# Altium PCB PCB1.PcbDoc
Units mm, origin at the board's own origin, x right, y up, seen from the top; angles counter-clockwise.
Board outline 49.96 x 48.34 mm, 2 copper layers (Top Layer, Bottom Layer); 54 components, 44 nets, 208 pads, 42 vias.
Unrouted connection lines stored in the file: 54.
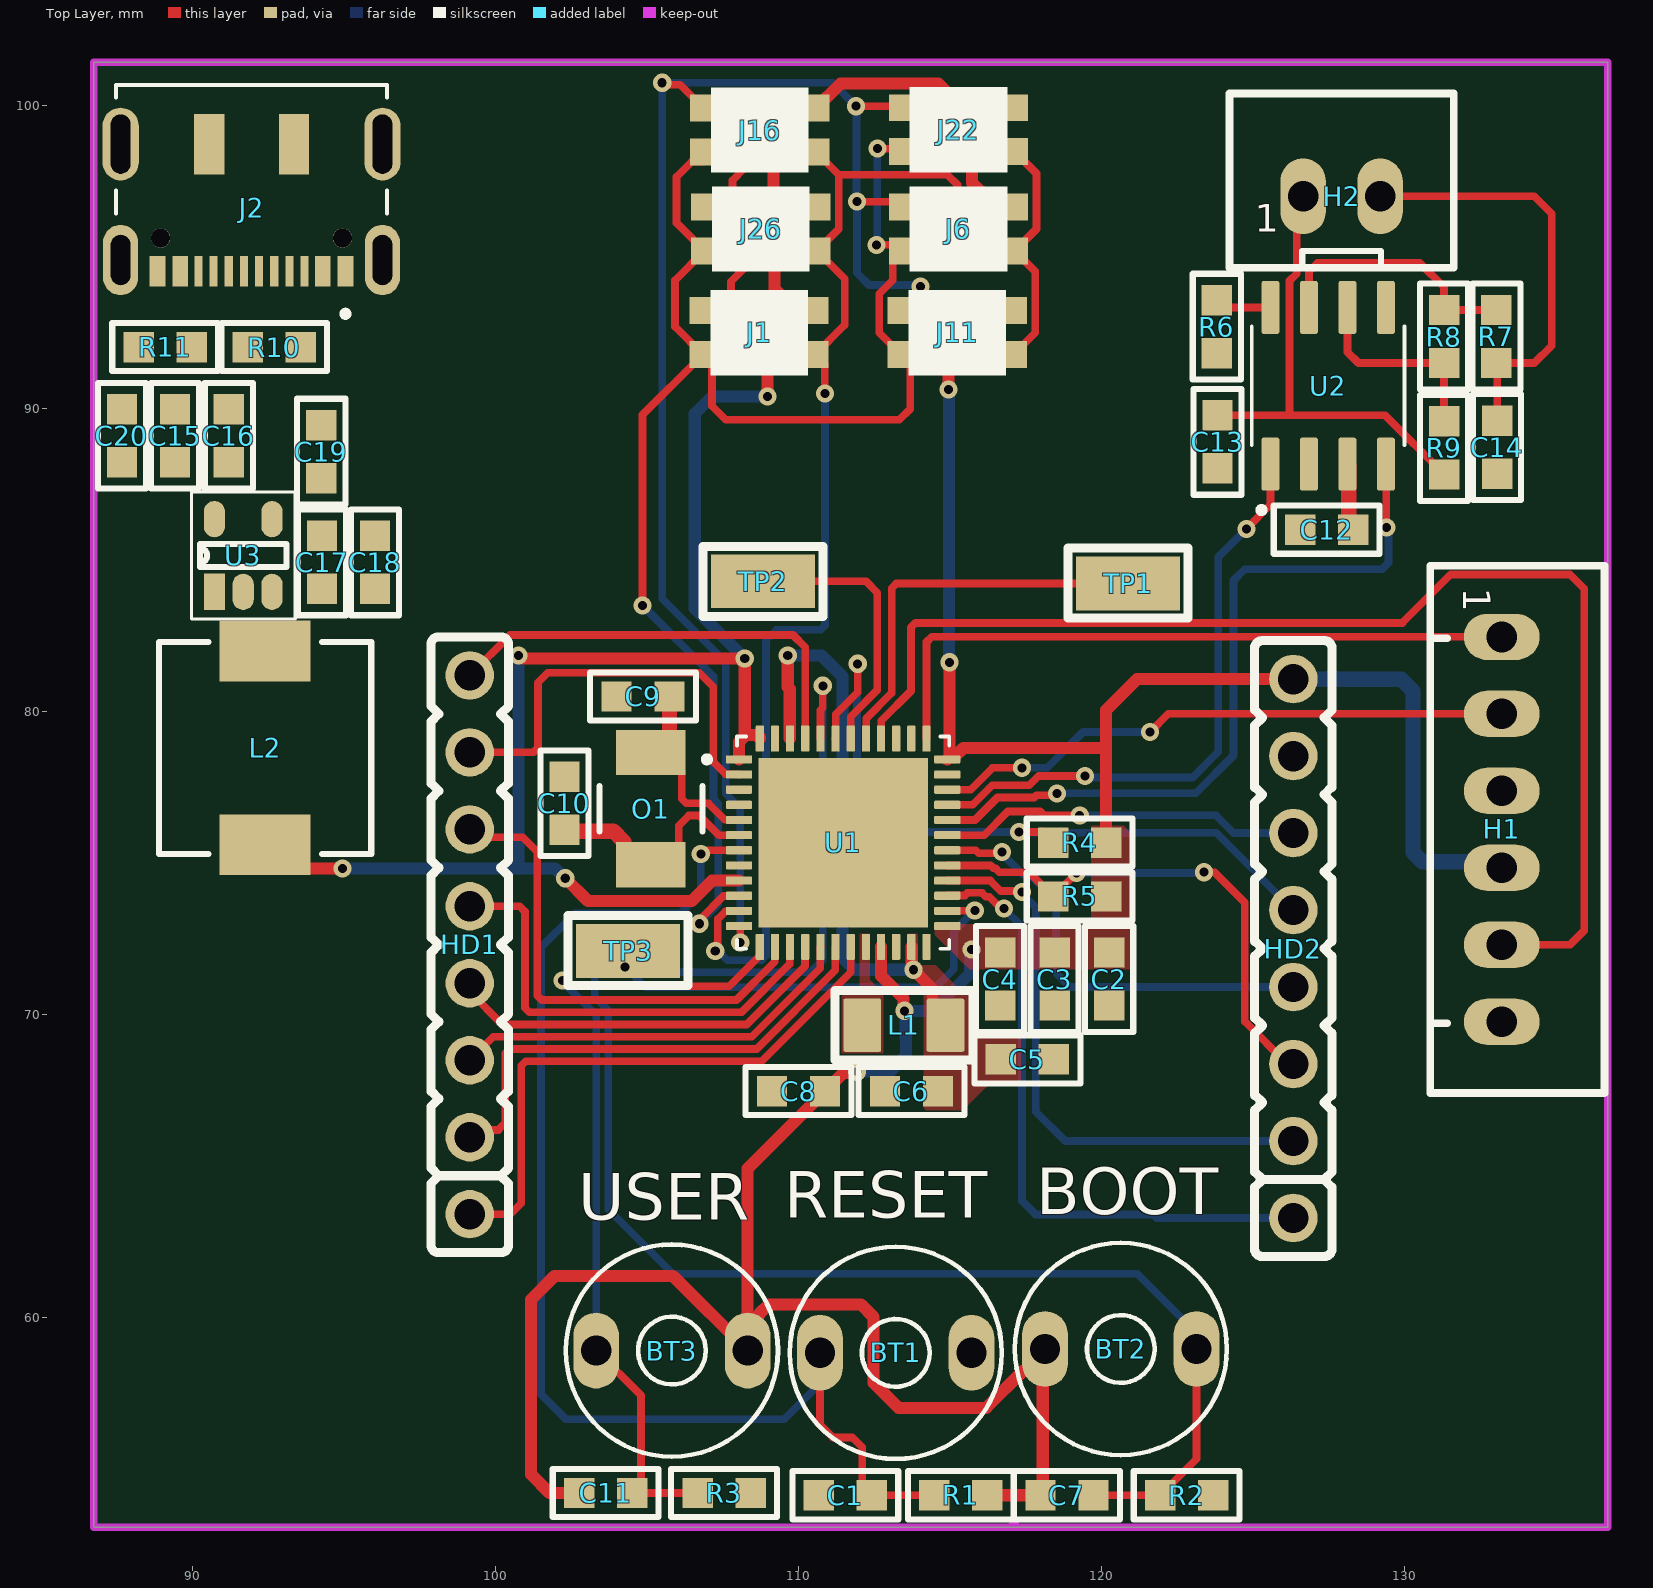
[diagram p0: Top Layer view]
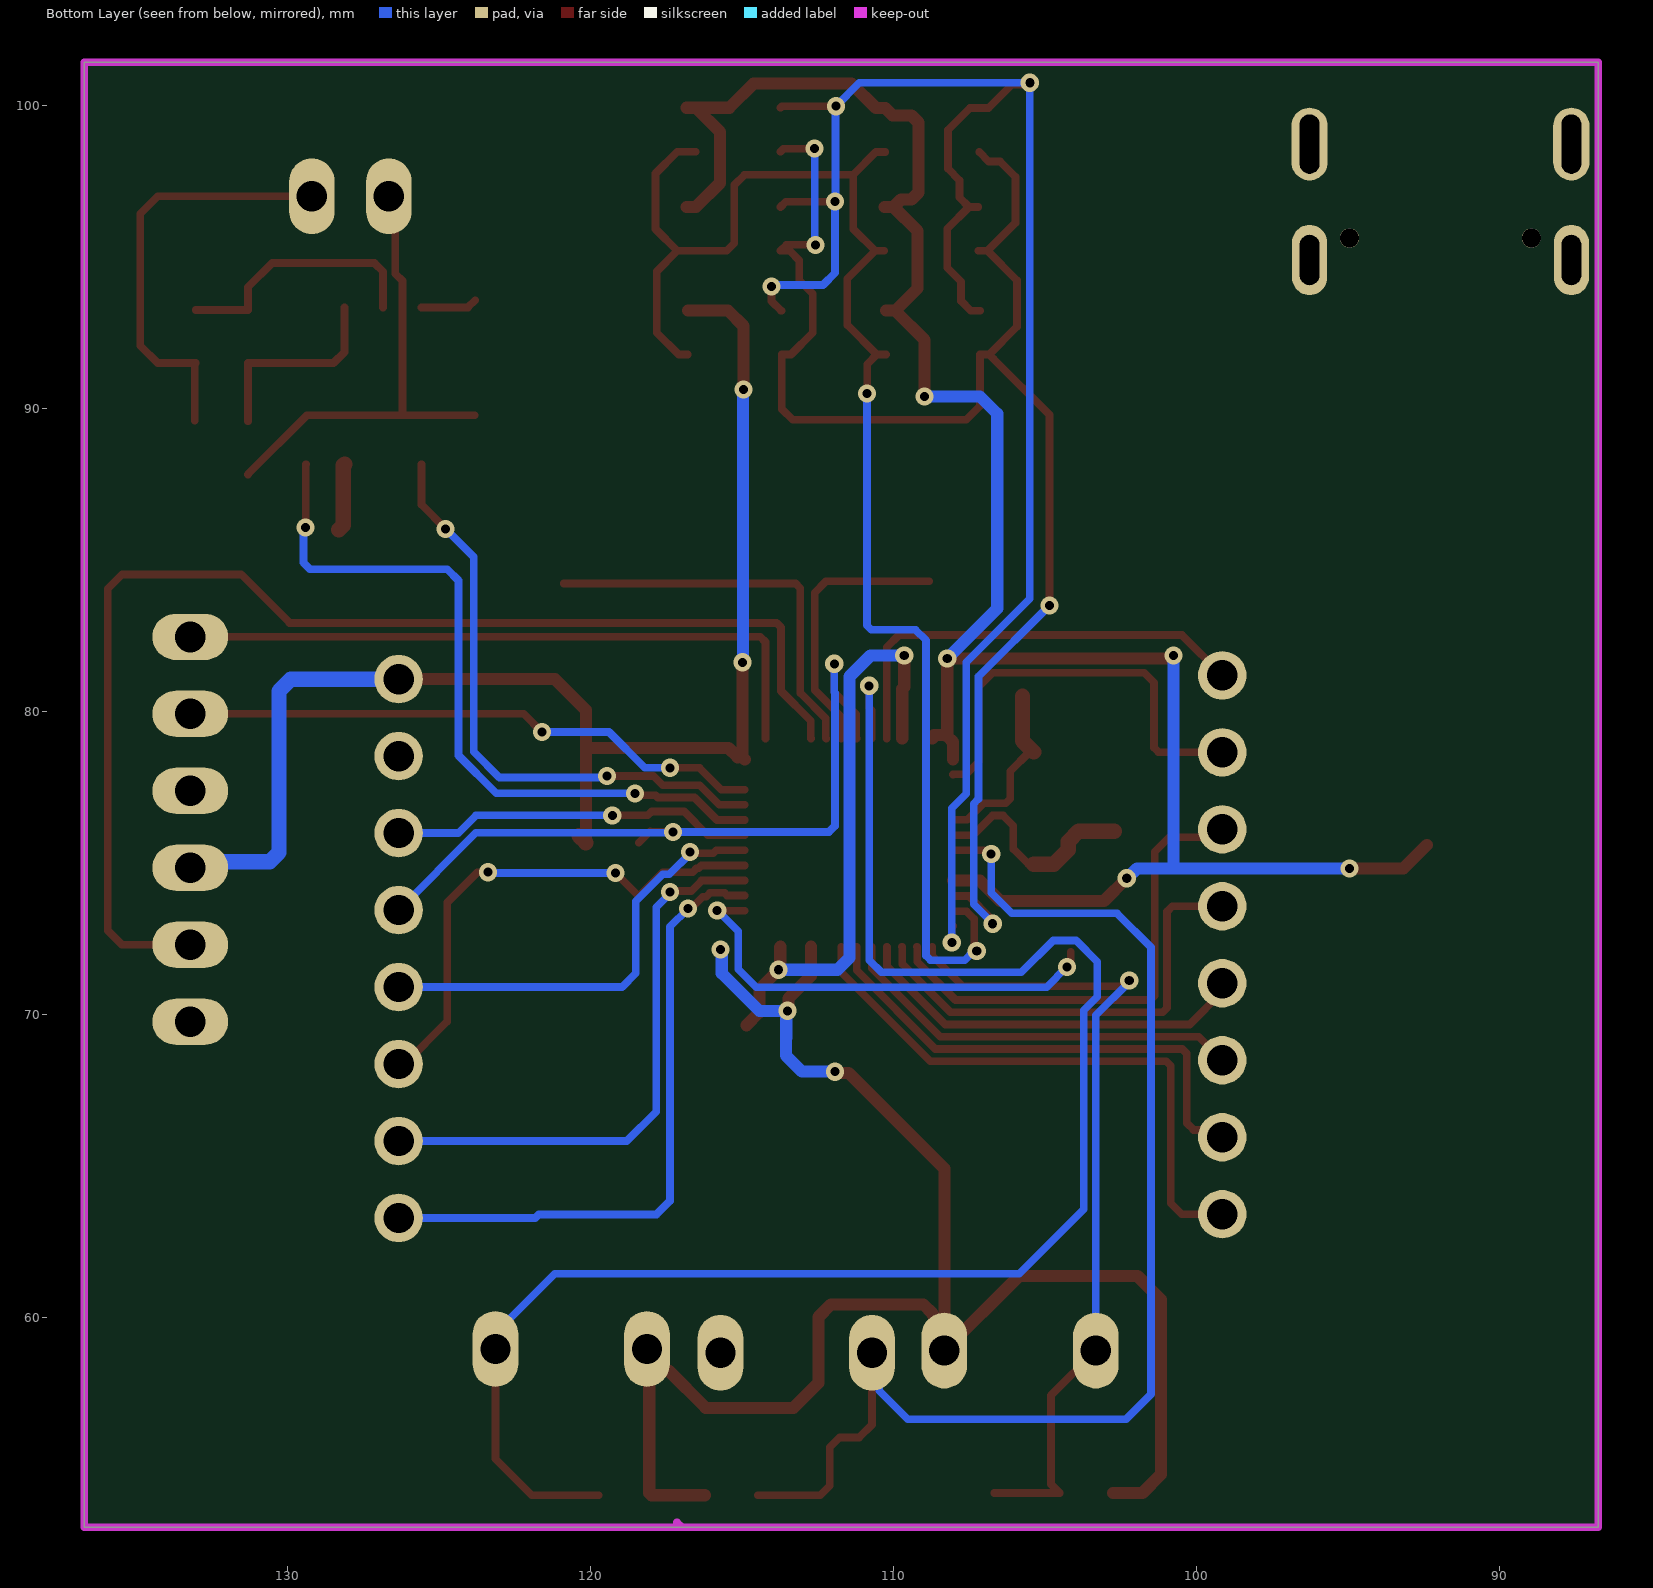
[diagram p1: Bottom Layer view, seen from below]
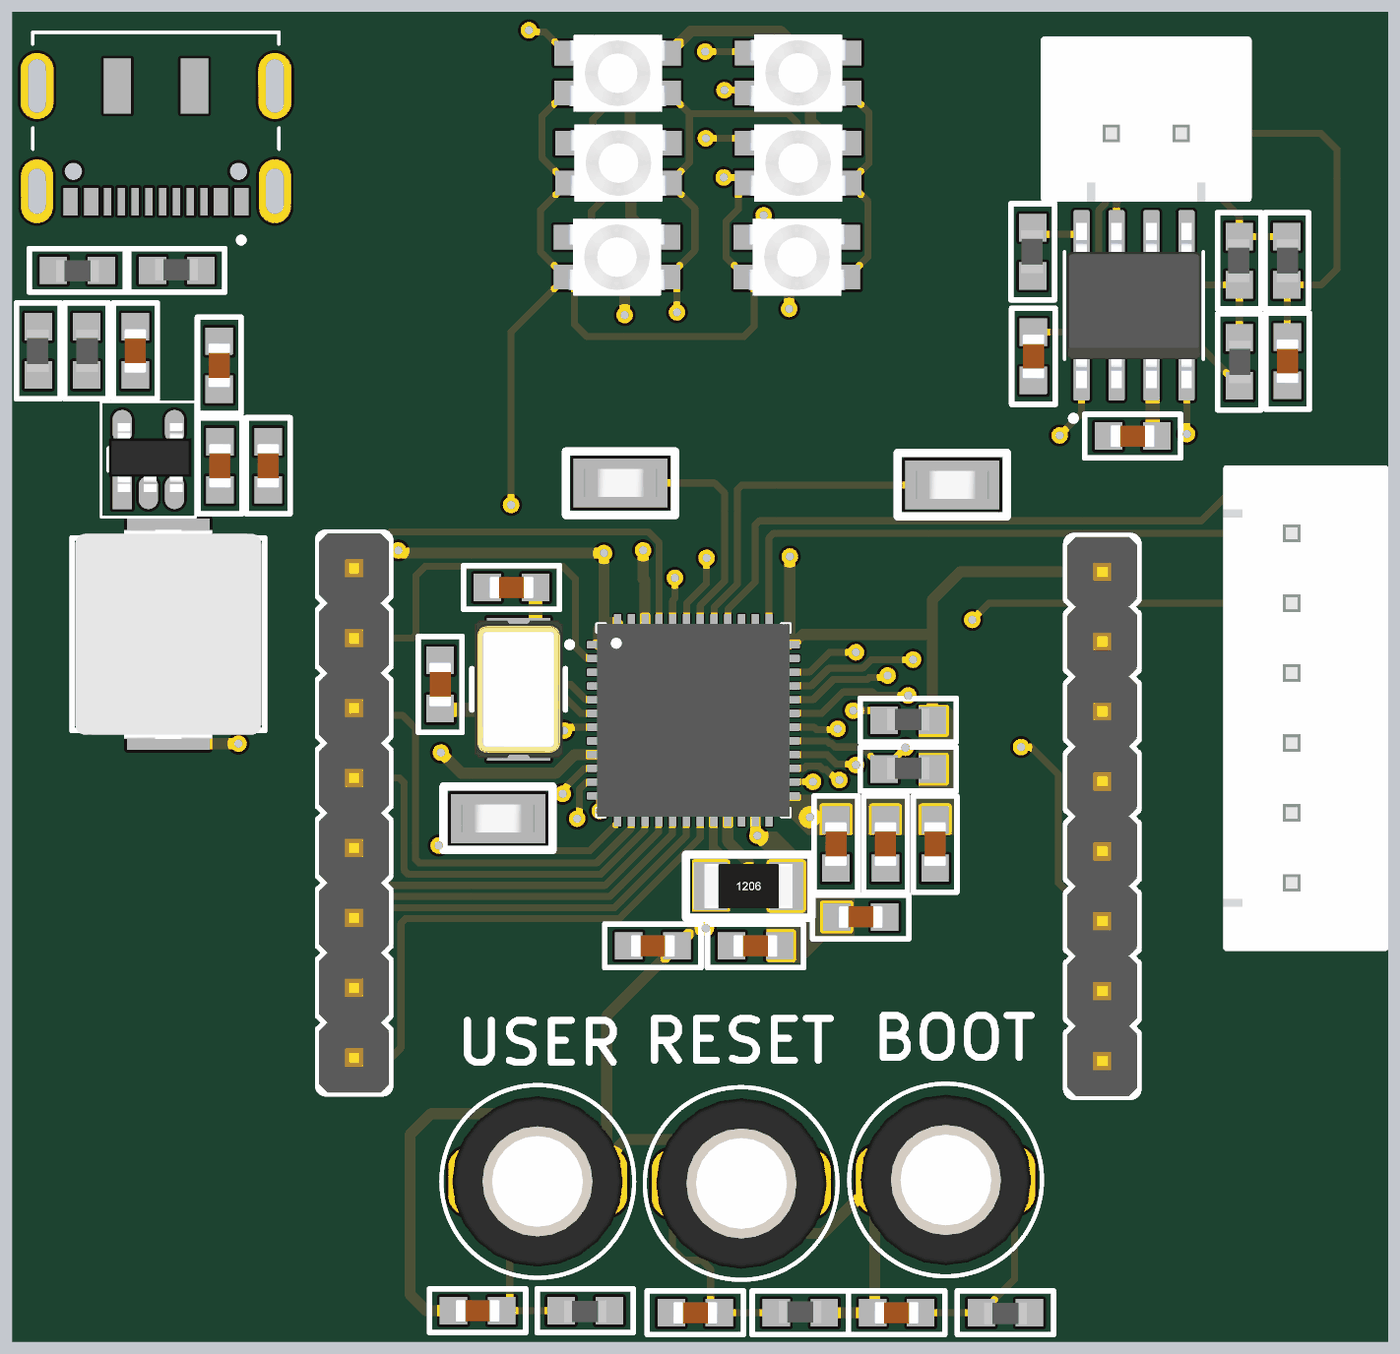
[diagram p2: 3D render of the assembled board from above, using the file's embedded part models]

## Layer stack, top to bottom
Top Solder: solder mask 0.0102, Solder Resist, Dk 3.5
Top Layer: signal copper 0.0356
Dielectric 1: dielectric 0.32, FR-4, Dk 4.8
Bottom Layer: signal copper 0.0356
Bottom Solder: solder mask 0.0102, Solder Resist, Dk 3.5

## Board outline
86.741,53.086 86.741,101.425 136.7,101.425 136.7,53.086

## Design rules (kind name [scope] priority, off if disabled: settings)
Clearance [All] p1: gap=0.15 ignorepadtopadclearanceinfootprint=FALSE
MinimumSolderMaskSliver [All] p1: minsoldermaskwidth=0.2
PlaneConnect [All] p1: planeconnectstyle=Direct reliefexpansion=0.508 reliefentries=4 reliefconductorwidth=0.254 reliefairgap=0.254
PolygonConnect [All] p1: connectstyle=Direct reliefconductorwidth=0.254 reliefentries=4 polygonreliefangle="90 Angle" airgapwidth=0.254
RoutingCorners [All] p1: cornerstyle=Round minsetback=2.54 maxsetback=2.54
RoutingVias [All] p1: holewidth=0.3 width=0.6 viastyle="Through Hole" minholewidth=0.3 minwidth=0.6 maxholewidth=0.3 maxwidth=0.6
SolderMaskExpansion [All] p1: expansion=0.102 istentingtop=FALSE
Width [All] p1: maxlimit=1 minlimit=0.254 preferedwidth=0.4 minimp=50.000000 maximp=50.000000 favimp=50.000000
27 further rules are at their usual default settings.

## Classes and differential pairs
component class POWER: C15 C16 C17 C18 C19 C20 HD1 HD2 J2 L2 R4 R5 R10 R11 U3
component class CAN: C12 C13 C14 H2 R6 R7 R8 R9 U2
component class "LED RGBSchDoc": J1 J6 J11 J16 J22 J26
component class Sheet1: BT1 BT2 BT3 C1 C2 C3 C4 C5 C6 C7 C8 C9 C10 C11 H1 L1 O1 R1 R2 R3 TP1 TP2 TP3 U1

## Components (designator, comment, footprint, x,y, rotation, side; value= is the part's Value field where it differs from the comment)
BT1 "SPST_DIP" SPST_BUTTON_2DIP 113.207,58.84 r0 top
BT2 "SPST_DIP" SPST_BUTTON_2DIP 120.633,58.967 r0 top
BT3 "SPST_DIP" SPST_BUTTON_2DIP 105.82,58.915 r180 top
C1 "100nF" C0603 111.542,54.141 r0 top
C2 "100nF" C0603 120.25,71.175 r90 top
C3 "1uF" C0603 118.45,71.175 r90 top
C4 "10uF" C0603 116.65,71.175 r90 top
C5 "2.2uF" C0603 117.55,68.525 r180 top
C6 "2.2uF" C0603 113.725,67.475 r0 top
C7 "100nF" C0603 118.855,54.141 r180 top
C8 "10uF" C0603 110,67.475 r180 top
C9 "10pF" C0603 104.867,80.499 r180 top
C10 "10pF" C0603 102.275,76.975 r90 top
C11 "100nF" C0603 103.635,54.216 r180 top
C12 "100nF" C0603 127.425,86 r180 top
C13 "30pF" C0603 123.825,88.9 r270 top
C14 "30pF" C0603 133.05,88.725 r270 top
C15 "100K" R0603 89.425,89.1 r270 top
C16 "22pF" C0603 91.2,89.1 r90 top
C17 "22uF" C0603 94.275,84.925 r270 top
C18 "22uF" C0603 96.025,84.925 r270 top
C19 "22uF" C0603 94.25,88.575 r90 top
C20 "22K" R0603 87.675,89.1 r90 top
H1 "XH2.54_6Y" JST-XH-06-PACKAGE-LONG-PAD 133.2,76.115 r270 top
H2 "XH2.54_2Y" JST-XH-02-PACKAGE-LONG-PAD 127.92,97 r0 top
HD1 "HD8" Header_8 99.15,72.305 r90 top
HD2 "HD8" Header_8 126.325,72.18 r90 top
J1 "SMP4-RGB" 4-PLCC 108.695,92.505 r90 top
J2 "DX07S016JA1R1500" JAE_DX07S016JA1R1500 91.95,95.625 r180 top
J6 "SMP4-RGB" 4-PLCC 115.275,95.925 r90 top
J11 "SMP4-RGB" 4-PLCC 115.233,92.505 r90 top
J16 "SMP4-RGB" 4-PLCC 108.72,99.189 r90 top
J22 "SMP4-RGB" 4-PLCC 115.275,99.2 r90 top
J26 "SMP4-RGB" 4-PLCC 108.75,95.925 r90 top
L1 "2.2uH" "Res 1206 SMD" 113.475,69.65 r0 top
L2 "2R2" L0630 92.4,78.8 r270 top
O1 "CRYSTAL_5032" CRYSTAL_5032 105.125,76.8 r90 top
R1 "10K" R0603 115.352,54.141 r0 top
R2 "10K" R0603 122.806,54.141 r180 top
R3 "10K" R0603 107.544,54.216 r180 top
R4 "4.7K" R0603 119.275,75.675 r0 top
R5 "4.7K" R0603 119.275,73.9 r0 top
R6 "10K" R0603 123.8,92.7 r90 top
R7 "0" R0603 133.025,92.375 r270 top
R8 "120" R0603 131.3,92.375 r90 top
R9 "0" R0603 131.3,88.7 r270 top
R10 "5.1K" R0603 92.7,92.025 r0 top
R11 "5.1K" R0603 89.1,92.025 r180 top
TP1 "TP" Test_point_SMD 120.875,84.225 r180 top value="Test Point"
TP2 "TP" Test_point_SMD 108.825,84.3 r0 top value="Test Point"
TP3 "TP" Test_point_SMD 104.375,72.1 r180 top value="Test Point"
U1 "STM32U585CIU6Q" QFN50P700X700X60-49N 111.471,75.673 r0 top
U2 "TJA1050T/CM,118" SOIC127P600X175-8N 127.475,90.75 r90 top
U3 "SY8089_1" SOT23-5 90.725,83.95 r90 top

## Footprints (in the part's own frame and the unit in brackets; to place one, negate y for a bottom-side part, rotate by r counter-clockwise, add the part's x,y. Pads: shape width x height; smd on the part's side, far side on the other; paste and mask are expansions set on the pad)
4-PLCC [mil]
  rect 35x59 smd: P$1(-28.5,61) P$2(-28.5,-61) P$3(28.5,61) P$4(28.5,-61)
  silkscreen extent -55,-63 55,63, body extent -55,-69 55,69, height 73
C0603 [mm]
  rect 1x1 smd: 1(-0.875,0) 2(0.875,0)
  silkscreen extent -1.75,-0.79 1.75,0.79, body extent -0.8,-0.4 0.8,0.4, height 0.87
CRYSTAL_5032 [mm]
  rect 1.5x2.3 smd: 1(-1.85,0) 2(1.85,0)
  silkscreen extent -0.75,-1.7 0.75,1.7, body extent -2.5,-1.6 2.5,1.6, height 0.8
Header_8 [mm] "Connector DIP Male, 8Pin_2.54mm"
  round 1.6 hole 1 mask+0.1: 1(-8.89,0) 2(-6.35,0) 3(-3.81,0) 4(-1.27,0) 5(1.27,0) 6(3.81,0) 7(6.35,0) 8(8.89,0)
  silkscreen extent -10.16,-1.28 10.16,1.28, body extent -10.16,-1.27 10.16,1.27, height 10.1
JAE_DX07S016JA1R1500 [mm]
  rect 0.52x1 smd: 1(-3.1,1.1) 2(-2.35,1.1) 11(2.35,1.1) 12(3.1,1.1)
  rect 0.27x1 smd: 3(-1.75,1.1) 4(-1.25,1.1) 5(-0.75,1.1) 6(-0.25,1.1) 7(0.25,1.1) 8(0.75,1.1) 9(1.25,1.1) 10(1.75,1.1)
  rect 1x2 smd: S1(-1.4,-3.1) S2(1.4,-3.1)
  oval 1.158x2.316 hole 0.65 slot 1.65 at 90 deg: S3(-4.32,0.725) S4(4.32,0.725)
  oval 1.2x2.4 hole 0.65 slot 1.95 at 90 deg: S5(-4.32,-3.1) S6(4.32,-3.1)
  round 0.63 hole 0.63 unplated: ""(-3,0) ""(3,0)
  round 0.6 hole 0.6 unplated: ""(3,0)
  silkscreen extent -4.47,-5.05 4.47,2.6
JST-XH-02-PACKAGE-LONG-PAD [mm]
  oval 1.5x2.5 hole 1.016: 1(-1.27,0) 2(1.27,0)
  silkscreen extent -3.7,-2.36 3.7,3.39, body extent -3.61,-2.49 3.61,3.35, height 7.21
JST-XH-06-PACKAGE-LONG-PAD [mil]
  oval 60x98.43 hole 40: 1(-250,0) 2(-150,0) 3(-50,0) 4(50,0) 5(150,0) 6(250,0)
  silkscreen extent -343,-93 343,134, body extent -342,-98 342,132, height 284
L0630 [mm]
  rect 2x3 smd: 1(-3.2,0) 2(3.2,0)
  silkscreen extent -3.5,-3.5 3.5,3.5, body extent -3.8,-3.37 3.8,3.37, height 3.2
QFN50P700X700X60-49N [mm]
  rrect25% 0.86x0.27 smd mask+0.05: 1(-3.435,2.75) 2(-3.435,2.25) 3(-3.435,1.75) 4(-3.435,1.25) 5(-3.435,0.75) 6(-3.435,0.25) 7(-3.435,-0.25) 8(-3.435,-0.75) 9(-3.435,-1.25) 10(-3.435,-1.75) 11(-3.435,-2.25) 12(-3.435,-2.75) 25(3.435,-2.75) 26(3.435,-2.25) 27(3.435,-1.75) 28(3.435,-1.25) 29(3.435,-0.75) 30(3.435,-0.25) 31(3.435,0.25) 32(3.435,0.75) 33(3.435,1.25) 34(3.435,1.75) 35(3.435,2.25) 36(3.435,2.75)
  rrect25% 0.27x0.86 smd mask+0.05: 13(-2.75,-3.435) 14(-2.25,-3.435) 15(-1.75,-3.435) 16(-1.25,-3.435) 17(-0.75,-3.435) 18(-0.25,-3.435) 19(0.25,-3.435) 20(0.75,-3.435) 21(1.25,-3.435) 22(1.75,-3.435) 23(2.25,-3.435) 24(2.75,-3.435) 37(2.75,3.435) 38(2.25,3.435) 39(1.75,3.435) 40(1.25,3.435) 41(0.75,3.435) 42(0.25,3.435) 43(-0.25,3.435) 44(-0.75,3.435) 45(-1.25,3.435) 46(-1.75,3.435) 47(-2.25,3.435) 48(-2.75,3.435)
  rect 5.6x5.6 smd paste-4 mask+0.05: 49(0,0)
  silkscreen extent -4.59,-3.5 3.5,3.5, body extent -3.5,-3.5 3.5,3.5, height 0.65
R0603 [mm]
  rect 1x1 smd: 1(-0.875,0) 2(0.875,0)
  silkscreen extent -1.75,-0.79 1.75,0.79, body extent -0.77,-0.38 0.77,0.43, height 0.46
"Res 1206 SMD" [mm] "Reflow Soldering"
  rrect10% 1.25x1.75 smd mask+0.1: 1(-1.375,0) 2(1.375,0)
  silkscreen extent -2.27,-1.15 2.28,1.14, body extent -1.6,-0.8 1.6,0.8, height 0.65
SOIC127P600X175-8N [mm]
  rrect25% 1.75x0.59 smd: 1(-2.585,1.905) 2(-2.585,0.635) 3(-2.585,-0.635) 4(-2.585,-1.905) 5(2.585,-1.905) 6(2.585,-0.635) 7(2.585,0.635) 8(2.585,1.905)
  silkscreen extent -4.2,-2.52 1.95,2.52, body extent -3,-2.45 3,2.45, height 1.75
SOT23-5 [mm]
  rect 1.2x0.7 smd: 1(0,0)
  oval 1.2x0.7 smd: 2(0,-0.95) 3(0,-1.9) 4(2.4,-1.9) 5(2.4,0)
  silkscreen extent -0.89,-2.67 3.3,0.76, body extent 0.02,-2.52 2.52,0.48, height 1.1
SPST_BUTTON_2DIP [mm]
  oval 1.508x2.5 hole 1: 1(-2.5,0) 2(2.5,0)
  silkscreen extent -3.5,-3.5 3.5,3.5, body extent -3.09,-3.1 3.11,3.1, height 5
Test_point_SMD [mil] "Test_point_SMD"
  rect 135x70 smd: 1(0,0)
  silkscreen extent -78,-46 78,45, body extent -53,-20 52,20, height 61

## Part data
BT1 BT2 BT3: Package=BT4, DeviceSetName=BT4, GateName_1=G$1, LibraryName=Uy_SMD, SymbolName_1=BT1
C1 C2 C3 C4 C5 C6 C7 C8 C9 C10 C11 C12 C13 C14 C16 C17 C18 C19: library part "Capacitor 0603"
C15 C20 R1 R2 R3 R4 R5 R6 R7 R8 R9 R10 R11: library part "Resistor 0603", "SMD Resistor 0603", Case Code (Imperial)=0603, Case Code (Metric)=1608, Manufacturer=Yageo, Manufacturer Part Number=RC0603FR-071KL, Max Operating Temperature=155°C, Max Power Dissipation=100mW, Min Operating Temperature=-55°C, Resistance Tolerance=1%, Resistor Type="Thick Film", Supplier Part Number=311-1.00KHRDKR-ND, Temperature Coefficient=100ppm/°C, Voltage Rating=50V, Case/Package=0603, Category="Chip SMD Resistors", Construction=Rectangular, Contact Plating=Tin,Matte, Depth=0.8mm, Features="Moisture Resistant", Height=0.45mm, Lead Free=5697LeadFree, Length=1.6mm, Military Standard=Not, Number of Terminations=2, Packaging="Tape and Reel", Power Rating=100mW, Pricing="1=0.1, 10=0.018, 50=0.0106, 100=0.0088, 500=0.00592, 1000=0.00505 (USD)", Reach SVHC Compliant=No, RoHS=Yes, RoHS Compliant=Yes, Series=RC, Stock=18662657, Supplier=Digi-Key, Technology="THICK FILM", Termination=SMD/SMT, Tolerance=1%
HD1 HD2: library part Header8, "Header 8", Creat by=VanDungEvn@Gmail.com
J1 J6 J11 J16 J22 J26: "Red, Green, Blue (RGB) 640nm Red, 570nm Green, 466nm Blue LED Indication - Discrete 1.85V Red, 1.9V Green, 3.3V Blue 4-PLCC", Package="PLCC-4 Bivar", Check_prices=https://www.snapeda.com/parts/SMP4-RGB/Bivar+Inc./view-part/?ref=eda, MF="Bivar Inc.", MP=SMP4-RGB, SnapEDA_Link=https://www.snapeda.com/parts/SMP4-RGB/Bivar+Inc./view-part/?ref=snap
J2: "USB-C (USB TYPE-C) USB 2.0 Receptacle Connector 24 (16+8 Dummy) Position Surface Mount, Right Angle; Through Hole", Package=None, Availability=Unavailable, MP=DX07S016JA1R1500, Price=None
L1: library part RES-1206, "RES SMD 5.1 OHM 1% 1/4W 1206", Manufacturer=Yageo, Manufacturer Part Number=RC1206FR-075R1L, Operating Temperature="-55°C ~ 155°C", Package / Case="1206 (3216 Metric)", Power (Watts)="0.25W, 1/4W", Resistance (Ohms)=5.1, Supplier Device Package=1206, Supplier Part Number 1=311-5.10FRCT-ND, Temperature Coefficient=±200ppm/°C, Tolerance=±1%, Category=Resistors, ComponentLink1Description=http://www.yageo.com/documents/recent/PYu-RC_Group_51_RoHS_L_7.pdf, ComponentLink1URL=http://www.yageo.com/documents/recent/PYu-RC_Group_51_RoHS_L_7.pdf, Composition="Thick Film", Failure Rate=-, Features="Moisture Resistant", Height - Seated (Max)="0.026\" (0.65mm)", Packaging="Cut Tape (CT)", Part Status=Active, Pricing 1="1=0.1, 10=0.051, 100=0.0207, 1000=0.0093, 2500=0.00807 (USD)", RoHS="RoHS Compliant", Size / Dimension="0.122\" L x 0.063\" W (3.10mm x 1.60mm)", Stock 1=96701, Supplier 1=Digi-Key
L2: library part "Inductor 0630", "HIGH POWER INDUCTOR 1040", Package="Nonstandard Wurth Electronics", Availability=Unavailable, MF="Wurth Electronics", MP=74437368047, Price=None, SnapEDA_Link=https://www.snapeda.com/parts/74437368047/Wurth%20Electronics%20Inc./view-part/286863/?ref=snap
O1: Package=5.0X3.2_2, DeviceName=-9B, DeviceSetName=CRYSTAL_5032, GateName_1=G$1, LibraryName=Uy_SMD, SymbolName_1=Q
TP1 TP2 TP3: library part Test_point_DNM, "Test Point"
U1: "ARM Microcontrollers - MCU Ultra-low-power FPU Arm Cortex-M33 Trust Zone, MCU 160 MHz 2Mbytes of Flash", Package="UFQFPN-48 STMicroelectronics", Check_prices=https://www.snapeda.com/parts/STM32U585CIU6Q/STMicroelectronics/view-part/?ref=eda, MF=STMicroelectronics, MP=STM32U585CIU6Q, SnapEDA_Link=https://www.snapeda.com/parts/STM32U585CIU6Q/STMicroelectronics/view-part/?ref=snap
U2: "1/1 Transceiver Half CANbus 8-SO", Package="SO-8 NXP Semiconductors", Availability="In Stock", Check_prices=https://www.snapeda.com/parts/TJA1050T/CM,118/NXP%20USA%20Inc./view-part/304529/?ref=eda, MF="NXP USA", MP=TJA1050T/CM,118, Price=None, Purchase-URL=https://pricing.snapeda.com/search/part/TJA1050T/CM,118/?ref=eda, SnapEDA_Link=https://www.snapeda.com/parts/TJA1050T/CM,118/NXP%20USA%20Inc./view-part/304529/?ref=snap

## Via types
v1: diameter 0.6, hole 0.3, Top Layer to Bottom Layer, 42 vias

## Nets (pads, with @x,y where several pads share a name; then routed paths per layer and width w, separated by ;. In a path a pad name is that pad's centre, name@x,y a point inside that pad or via, vN(x,y) a via of type N, cw(c..) or ccw(c..) an arc to the next point about the centre after c; other vN are vias at no path point)
5V: C12.1 C19.2 J2.2 J2.11 U2.3 U3.1 U3.4 | length 2.2
  Top Layer w0.508: U2.3 128.151,88.124 128.151,86.149 C12.1
BOOT_STM: BT2.2 C7.1 R2.2 U1.44 | length 56.8
  Top Layer w0.254: U1.44 110.721,80.042 110.8,80.121 v1(110.8,80.85) ; C7.1 R2.2 123.133,55.343 BT2.2
  Bottom Layer w0.254: v1(110.8,80.85) 110.8,71.8 110.395,71.395 105.78,71.395 104.729,72.446 103.974,72.446 103.275,71.747 103.275,70.593 103.724,70.144 103.724,63.576 105.85,61.45 121.175,61.45 123.133,59.492 BT2.2
CLK: H1.1 U1.37 | length 22.4
  Top Layer w0.254: U1.37 114.221,82.296 114.39,82.465 132.825,82.465 H1.1@133.2,82.84
DIO: H1.2 U1.34 | length 19.3
  Top Layer w0.254: U1.34 115.68,77.423 116.402,78.144 v1(117.375,78.144) ; v1(121.6,79.325) 122.2,79.925 H1.2
  Bottom Layer w0.254: v1(117.375,78.144) 118.205,78.144 119.385,79.325 v1(121.6,79.325)
GND: BT1.2 C1.1 C2.1 C3.1 C4.1 C5.1 C6.1 C8.2 C9.2 C10.2 C12.2 C13.2 C14.2 C17.1 C18.1 C19.1 C20.2 H1.3 HD2.7 J2.1 J2.12 J2.S1 J2.S2 J2.S3 J2.S4 J2.S5 J2.S6 R2.1 R3.1 R6.1 R10.1 R11.1 U1.8 U1.22 U1.24 U1.35 U1.47 U2.2 U3.2
NetC9_1: C9.1 O1.2 U1.5 | length 6.1
  Top Layer w0.254: O1.2@105.375,78.666 105.509,78.666 106.148,78.027 106.148,77.12 106.297,76.971 107.025,76.971 107.566,76.431 108.028,76.431 U1.5
  Top Layer w0.508: O1.2@105.375,78.666 105.742,79.033 C9.1
NetC10_1: C10.1 O1.1 U1.6 | length 7.3
  Top Layer w0.254: O1.1@105.375,74.966 105.541,74.966 106.042,75.467 106.042,76.229 106.38,76.567 106.73,76.567 107.374,75.923 U1.6
  Top Layer w0.508: C10.1@102.708,76.054 103.887,76.054 104.229,75.712 104.229,75.446 104.709,74.966 O1.1@105.375,74.966
NetC13_1: C13.1 H2.1 R9.2 | length 15.7
  Top Layer w0.254: C13.1 126.2,89.775 ; H2.1 126.436,96.786 126.436,94.45 126.2,94.214 126.2,89.775 ; R9.2 129.35,89.775 126.2,89.775
NetC14_1: C14.1 H2.2 R7.2 | length 14.2
  Top Layer w0.254: H2.2 134.275,97 134.85,96.425 134.85,92.075 134.275,91.5 R7.2 133.05,91.475 C14.1
NetC15_2: C15.2 C16.1 C20.1 U3.5
NetHD1_1: HD1.1 U1.19 | length 19.4
  Top Layer w0.254: HD1.1 100.49,63.415 100.85,63.775 100.85,68.314 100.999,68.463 108.788,68.463 111.721,71.396 U1.19
NetHD1_2: HD1.2 U1.18 | length 16.5
  Top Layer w0.254: HD1.2 99.391,66.196 100.096,66.196 100.325,66.425 100.325,68.718 100.474,68.867 108.62,68.867 111.213,71.459 111.213,72.23 U1.18
NetHD1_3: HD1.3 U1.17 | length 13.5
  Top Layer w0.254: HD1.3 99.926,69.271 108.453,69.271 110.713,71.531 110.713,72.23 U1.17
NetHD1_4: HD1.4 U1.16 | length 13.2
  Top Layer w0.254: HD1.4 99.15,70.75 100.225,69.675 108.285,69.675 110.213,71.602 110.213,72.23 U1.16
NetHD1_5: HD1.5 U1.15 | length 15.1
  Top Layer w0.254: HD1.5 100.8,73.575 100.971,73.404 100.971,70.227 101.12,70.079 108.118,70.079 109.713,71.673 109.713,72.23 U1.15
NetHD1_6: HD1.6 U1.14 | length 16.2
  Top Layer w0.254: HD1.6 99.408,75.857 100.893,75.857 101.375,75.375 101.375,70.631 101.524,70.483 107.951,70.483 109.213,71.745 109.213,72.23 U1.14
NetHD1_7: HD1.7 U1.2 | length 14.1
  Top Layer w0.254: HD1.7 101.251,78.655 101.4,78.804 101.4,80.95 101.726,81.276 106.724,81.276 107.184,80.816 107.184,78.338 107.591,77.931 108.028,77.931 U1.2
NetHD1_8: HD1.8 U1.45 | length 14.8
  Top Layer w0.254: HD1.8 100.48,82.525 109.816,82.525 110.221,82.12 U1.45
NetHD2_1: HD2.1 U1.27 | length 21.2
  Top Layer w0.254: U1.27 114.914,73.931 115.49,73.931 115.576,74.017 116.049,74.017 116.176,73.89 116.291,73.89 116.681,73.5 v1(116.775,73.5)
  Bottom Layer w0.254: v1(116.775,73.5) 117.375,72.9 117.375,63.85 117.821,63.404 121.705,63.404 121.819,63.29 HD2.1
NetHD2_2: HD2.2 U1.28 | length 19
  Top Layer w0.254: U1.28 116.33,74.423 116.676,74.077 117.348,74.077 v1(117.375,74.05)
  Bottom Layer w0.254: v1(117.375,74.05) 117.375,73.987 117.825,73.537 117.825,66.8 118.795,65.83 HD2.2
NetHD2_3: HD2.3 R5.1 U1.29 | length 17.1
  Top Layer w0.254: U1.29 116.336,74.923 116.432,74.827 116.497,74.827 116.626,74.698 117.602,74.698 R5.1 v1(119.175,74.675) ; v1(123.375,74.7) 123.725,74.7 124.725,73.7 124.725,69.775 126.13,68.37 HD2.3
  Bottom Layer w0.254: v1(119.175,74.675) 123.35,74.675 v1(123.375,74.7)
NetHD2_4: HD2.4 U1.30 | length 14.7
  Top Layer w0.254: U1.30 115.845,75.423 115.941,75.327 116.677,75.327 v1(116.712,75.362)
  Bottom Layer w0.254: v1(116.712,75.362) 116.712,75.313 117.398,74.627 117.614,74.627 118.5,73.741 118.5,71.367 118.957,70.91 HD2.4
NetHD2_5: HD2.5 R4.1 U1.43 | length 25
  Top Layer w0.254: U1.43 111.223,79.11 111.223,79.907 111.95,80.634 v1(111.95,81.575) ; v1(117.275,76.025) 118.027,76.025 118.027,76.048 R4.1
  Bottom Layer w0.254: v1(111.95,81.575) 111.95,80.634 111.927,80.611 111.927,76.226 112.128,76.025 v1(117.275,76.025) 117.302,75.998 123.777,75.998 HD2.5
NetHD2_6: HD2.6 U1.31 | length 12
  Top Layer w0.254: U1.31 116.123,75.923 116.902,76.702 117.978,76.702 118.105,76.575 v1(119.275,76.575)
  Bottom Layer w0.254: v1(119.275,76.575) 123.771,76.575 124.356,75.99 HD2.6
NetJ1_P$1: J1.P$1 J6.P$1 J11.P$1 J16.P$1 J22.P$1 J26.P$1 U1.10 | length 52.7
  Top Layer w0.254: v1(104.85,83.5) 104.85,89.79 106.7,91.64 J1.P$1@106.841,91.781 ; v1(106.725,73) 106.791,73.066 106.791,73.187 107.52,73.915 108.028,73.915 U1.10 ; J16.P$1 106.853,98.148 106.473,98.148 105.975,97.65 105.975,96.122 J26.P$1@106.896,95.201 ; J26.P$1 J26.P$1@106.896,95.201 ; v1(112.575,95.4) 113.527,95.4 J6.P$1 113.421,95.201 113.103,94.884 113.103,94.234 112.657,93.788 112.657,92.503 113.379,91.781 J11.P$1 113.684,89.984 113.325,89.625 107.6,89.625 107.146,90.079 J1.P$1 ; v1(112.6,98.575) 113.627,98.575 J22.P$1 ; J1.P$1@106.841,91.781 J1.P$1 ; J1.P$1@106.841,91.781 J1.P$1 ; J1.P$1@106.841,91.781 105.925,92.697 105.925,94.23 J26.P$1@106.896,95.201
  Bottom Layer w0.254: v1(104.85,83.5) 107.196,81.154 107.196,77.116 107.352,76.96 107.352,73.648 106.725,73.021 v1(106.725,73) ; v1(112.575,95.4) 112.6,95.425 v1(112.6,98.575)
NetJ1_P$2: J1.P$2 J6.P$2 J11.P$2 J16.P$2 J22.P$2 J26.P$2 U1.11 | length 51.1
  Top Layer w0.254: v1(107.25,72.1) 107.25,72.194 107.329,72.273 107.329,73.153 107.591,73.415 108.028,73.415 U1.11 ; J1.P$2 J1.P$2@110.549,91.781 ; J16.P$2 110.575,98.465 111.326,97.714 ; J26.P$2 J26.P$2@110.604,95.201 ; v1(110.875,90.5) 110.867,90.508 110.867,91.464 J1.P$2@110.549,91.781 ; J22.P$2@116.52,98.476 J22.P$2 117.129,98.476 117.851,97.755 117.851,95.923 J6.P$2@117.129,95.201 ; J11.P$2 117.087,91.781 117.809,92.503 117.809,94.522 J6.P$2@117.129,95.201 ; J1.P$2@110.549,91.781 111.525,92.757 111.525,94.28 J26.P$2@110.604,95.201 ; J26.P$2@110.604,95.201 111.326,95.923 111.326,97.714 ; 111.326,97.714 114.911,97.714 115.25,97.375 115.25,95.45 115.499,95.201 J6.P$2@117.129,95.201
  Bottom Layer w0.254: v1(107.25,72.1) 107.344,72.1 107.645,71.799 108.774,71.799 108.923,71.948 108.923,82.348 109.275,82.7 110.726,82.7 110.875,82.849 v1(110.875,90.5)
NetJ1_P$3: J1.P$3 J6.P$3 J11.P$3 J16.P$3 J22.P$3 J26.P$3 U1.12 | length 60
  Top Layer w0.254: v1(105.5,100.75) 105.566,100.684 106.095,100.684 106.866,99.913 107.476,99.913 108.197,99.191 108.197,97.906 107.823,97.532 107.823,96.966 J26.P$3@107.505,96.649 ; J1.P$3 107.45,93.229 107.768,93.546 107.768,94.183 108.227,94.642 108.227,95.927 J26.P$3@107.505,96.649 ; J26.P$3 J26.P$3@107.505,96.649 ; U1.12 108.065,72.923 108.073,72.915 v1(108.073,72.376) ; v1(111.9,99.975) 113.674,99.975 J22.P$3 ; v1(111.925,96.825) 113.549,96.825 J6.P$3 ; J11.P$3 113.707,93.229 114.025,93.546 v1(114.025,94.025)
  Bottom Layer w0.254: v1(108.073,72.376) 108.073,76.811 107.6,77.284 107.6,81.625 105.5,83.725 v1(105.5,100.75) 111.125,100.75 111.913,99.962 111.913,96.837 v1(111.925,96.825) 111.925,94.475 112.325,94.075 113.975,94.075 v1(114.025,94.025)
NetJ2_3: J2.3 R10.2
NetJ2_9: J2.9 R11.2
NetL1_1: L1.1 U1.20
NetL2_1: L2.1 U3.3
NetR6_2: R6.2 U2.8 | length 1.9
  Top Layer w0.254: R6.2 124.04,93.335 U2.8
NetR7_1: R7.1 R8.2 U2.7 | length 8.6
  Top Layer w0.254: U2.7 126.84,94.515 127.125,94.8 130.5,94.8 131.3,94 R8.2 R7.1
NetR8_1: R8.1 R9.1 U2.6 | length 6.7
  Top Layer w0.254: U2.6 128.11,91.865 128.475,91.5 R8.1 R9.1
NetTP1_1: TP1.1 U1.41 | length 13.2
  Top Layer w0.254: U1.41 112.229,79.116 112.229,79.77 113.073,80.614 113.073,84.073 113.225,84.225 TP1.1
NetTP2_1: TP2.1 U1.42 | length 9.1
  Top Layer w0.254: TP2.1 112.225,84.3 112.6,83.925 112.6,80.713 111.721,79.834 U1.42
NetTP3_1: TP3.1 U1.26 | length 15.1
  Top Layer w0.254: TP3.1@104.15,72.075 104.15,71.7 v1(104.275,71.575) ; U1.26 114.914,73.431 115.806,73.431 v1(115.815,73.44)
  Bottom Layer w0.254: v1(104.275,71.575) 104.945,70.905 114.53,70.905 115.125,71.5 115.125,72.75 v1(115.815,73.44)
NetU1_32: U1.32 U2.4 | length 24.7
  Top Layer w0.254: U1.32 115.823,76.423 116.563,77.163 117.781,77.163 117.852,77.234 118.459,77.234 v1(118.525,77.3) ; U2.4 129.39,88.155 129.39,86.085 v1(129.4,86.075)
  Bottom Layer w0.254: v1(118.525,77.3) 123.1,77.3 124.35,78.55 124.35,84.325 124.725,84.7 129.25,84.7 129.466,84.916 129.466,86.009 v1(129.4,86.075)
NetU1_33: U1.33 U2.1 | length 19.9
  Top Layer w0.254: U1.33 115.752,76.923 116.396,77.567 117.614,77.567 117.924,77.877 v1(119.45,77.877) ; v1(124.775,86.025) 125.57,86.82 U2.1
  Bottom Layer w0.254: v1(119.45,77.877) 119.502,77.825 123,77.825 123.85,78.675 123.85,85.1 v1(124.775,86.025)
RST: H1.5 U1.40 | length 41.4
  Top Layer w0.254: U1.40 112.729,79.116 112.729,79.699 113.71,80.68 113.71,82.776 113.859,82.925 129.925,82.925 131.525,84.525 135.45,84.525 135.925,84.05 135.925,72.775 135.455,72.305 H1.5
RST_STM: BT1.1 C1.2 R1.1 U1.7 | length 42.3
  Top Layer w0.254: v1(106.775,75.3) 106.869,75.3 106.992,75.423 U1.7 ; BT1.1 110.707,56.468 111.125,56.05 111.775,56.05 112.098,55.727 112.098,54.46 C1.2 R1.1
  Bottom Layer w0.254: v1(106.775,75.3) 106.775,74.025 106.1,73.35 102.625,73.35 101.5,72.225 101.5,57.475 102.325,56.65 109.53,56.65 110.467,57.587 110.467,58.6 BT1.1
USER: BT3.2 C11.1 R3.2 U1.13 | length 27.5
  Top Layer w0.254: v1(102.219,71.122) 102.268,71.122 102.456,70.934 107.712,70.934 108.721,71.943 U1.13 ; BT3.2 104.8,57.435 104.8,54.506 C11.1 R3.2
  Bottom Layer w0.254: v1(102.219,71.122) 102.219,71.077 103.32,69.977 BT3.2
VDD11: C5.2 C6.2 L1.2 U1.23 U1.46 | length 19.7
  Top Layer w0.4: v1(109.644,81.85) 109.644,80.815 109.709,80.75 109.709,79.121 U1.46 ; U1.23 113.736,72.223 113.736,71.596 113.796,71.536 v1(113.796,71.482) 113.796,71.466 114.425,70.838 114.425,70.075 L1.2
  Bottom Layer w0.4: v1(109.644,81.85) 110.756,81.85 111.45,81.156 111.45,71.875 111.843,71.482 v1(113.796,71.482)
VDDSMPS: BT2.1 BT3.1 C2.2 C3.2 C4.2 C7.2 C8.1 C11.2 C15.1 C16.2 C17.2 C18.2 H1.4 HD2.8 J1.P$4 J6.P$4 J11.P$4 J16.P$4 J22.P$4 J26.P$4 L2.2 R1.2 R4.2 R5.2 U1.1 U1.9 U1.21 U1.25 U1.36 U1.48 | length 172.6
  Top Layer w0.4: L2.2 93.175,74.825 v1(94.95,74.825) ; v1(100.755,81.845) 100.809,81.845 100.901,81.753 108.222,81.753 v1(108.225,81.75) 108.225,79.182 ; v1(102.3,74.5) 103.05,73.75 106.475,73.75 107.148,74.423 U1.9 ; C11.2 101.784,54.216 101.175,54.825 101.175,60.6 101.95,61.375 105.86,61.375 BT3.1 BT3.1@108.32,59.745 ; U1.1 108.036,78.993 108.225,79.182 ; U1.48 108.721,79.162 108.656,79.227 108.27,79.227 108.225,79.182 ; v1(108.975,90.4) 108.975,92.264 J1.P$4@109.94,93.229 ; J1.P$4 J1.P$4@109.94,93.229 ; J26.P$4 J26.P$4@109.995,96.649 ; v1(111.923,68.117) 111.885,68.079 111.479,68.079 C8.1 108.32,64.92 BT3.1@108.32,59.745 ; U1.21 112.721,71.279 113.462,70.538 113.462,70.163 v1(113.5,70.125) ; U1.36 114.975,78.492 v1(114.975,81.625) ; v1(114.95,90.625) 114.95,92.725 115.454,93.229 J11.P$4 ; U1.36@115.136,78.488 115.442,78.794 120.15,78.794 ; R1.2 C7.2 118.056,54.217 118.056,58.891 BT2.1 118.133,58.771 117.621,58.259 117.425,58.259 116.191,57.025 113.3,57.025 112.475,57.85 112.475,60.025 112.06,60.44 109.015,60.44 108.71,60.135 108.71,60.101 108.354,59.745 BT3.1@108.32,59.745 ; J6.P$4 116.52,96.649 115.725,97.443 115.725,99.129 J22.P$4@116.52,99.924 ; J22.P$4 J22.P$4@116.52,99.924 ; R4.2 120.15,78.794 ; HD2.8 121.17,81.07 120.15,80.05 120.15,78.794 ; J1.P$4@109.94,93.229 109.2,93.968 109.2,95.854 J26.P$4@109.995,96.649 ; J26.P$4@109.995,96.649 109.75,96.893 109.405,96.893 109.17,97.128 109.17,99.434 109.405,99.668 110.025,99.668 J16.P$4 110.575,99.913 111.38,100.718 114.62,100.718 115.414,99.924 J22.P$4@116.52,99.924
  Top Layer w0.508: R4.2 R4.2@120.375,75.9
  Bottom Layer w0.4: v1(94.95,74.825) 100.75,74.825 ; v1(100.755,81.845) 100.755,74.829 100.75,74.825 ; v1(102.3,74.5) 102.291,74.5 101.966,74.825 100.75,74.825 ; v1(108.225,81.75) 106.575,83.4 106.575,89.825 107.15,90.4 v1(108.975,90.4) ; v1(111.923,68.117) 113.017,68.117 113.55,68.65 113.55,69.221 113.538,69.233 113.538,70.087 v1(113.5,70.125) 114.425,70.125 115.664,71.364 115.664,72.112 v1(115.702,72.15) ; v1(114.95,90.625) 114.963,90.613 114.963,81.637 v1(114.975,81.625)
  Bottom Layer w0.508: HD2.8 129.88,81.07 130.275,80.675 130.275,75.35 130.586,75.039 133.006,75.039 H1.4
pads on no net: H1.6 J2. J2.4 J2.5 J2.6 J2.7 J2.8 J2.10 U1.3 U1.4 U1.38 U1.39 U1.49 U2.5

## Polygon pours and split planes (outlines as drawn)
NetL1_1 on Top Layer "NETL1_1_L01_P001" (solid, remove dead copper, pour order 1): 112.025,72.675 112.025,70.7 111.525,70.7 111.425,70.6 111.425,68.725 112.775,68.725 112.8,68.75 112.8,70.7 112.35,71.15 112.35,72.675
VDDSMPS on Top Layer "VDDSMPS_L01_P000" (solid, remove dead copper, pour order 0): 114.5,73.05 114.575,72.975 119.65,72.975 119.65,76.2 119.675,76.225 120.725,76.225 120.975,75.975 120.975,71.5 115.625,71.5 114.5,72.625 114.5,72.825
VDD11 on Top Layer "VDD11_L01_P002" (solid, remove dead copper, pour order 2): 113.6,72.675 113.6,71.5 114.125,70.975 114.125,66.95 114.075,66.9 114.125,66.85 115.425,66.85 116.375,67.8 117.325,67.8 117.325,69.3 117.2,69.425 116.025,69.425 115.725,69.725 115.725,70.925 115.225,70.925 114.525,71.625 113.925,71.625 113.925,72.65 113.9,72.675

## Keep-outs
Keep-Out Layer:
  lines w0.254: 117.017,53.125 117.144,53.252 ; 86.741,53.086 86.741,101.425 136.7,101.425 136.7,53.086 86.741,53.086

## Silkscreen, mask and mechanical layers (free items; w line width, h text height)
Top Overlay:
  text "BOOT" at 117.839,63.412 h1.52
  text "RESET" at 109.529,63.304 h1.52
  text "USER" at 102.732,63.233 h1.52

## Text inside footprints (layer, text, board x,y; h text height)
H1: Top Overlay "1" at 131.613,84.082 h1.57 r270
H2: Top Overlay "1" at 125.053,95.513 h1.57
HD1: Top Assembly "8" at 99.55,80.905 h1.2 r90; Top Assembly "1" at 99.55,63.205 h1.2 r90
HD2: Top Assembly "1" at 126.725,63.08 h1.2 r90; Top Assembly "8" at 126.725,80.78 h1.2 r90
J2: Mechanical 13 "PCB EDGE" at 86.45,100.375 h0.61 r180
TP1: Mechanical 1 "TP?" at 124.177,83.082 h1 r90
TP2: Mechanical 1 "TP?" at 108.825,84.3 h1
TP3: Mechanical 1 "TP?" at 104.375,72.1 h1 r180